# Altium PCB PCB1.PcbDoc
Units mil, origin at the board's own origin, x right, y up, seen from the top; angles counter-clockwise.
Board outline 870 x 2045 mil, 2 copper layers (Top Layer, Bottom Layer); 38 components, 55 nets, 170 pads, 24 vias.
Unrouted connection lines stored in the file: 35.
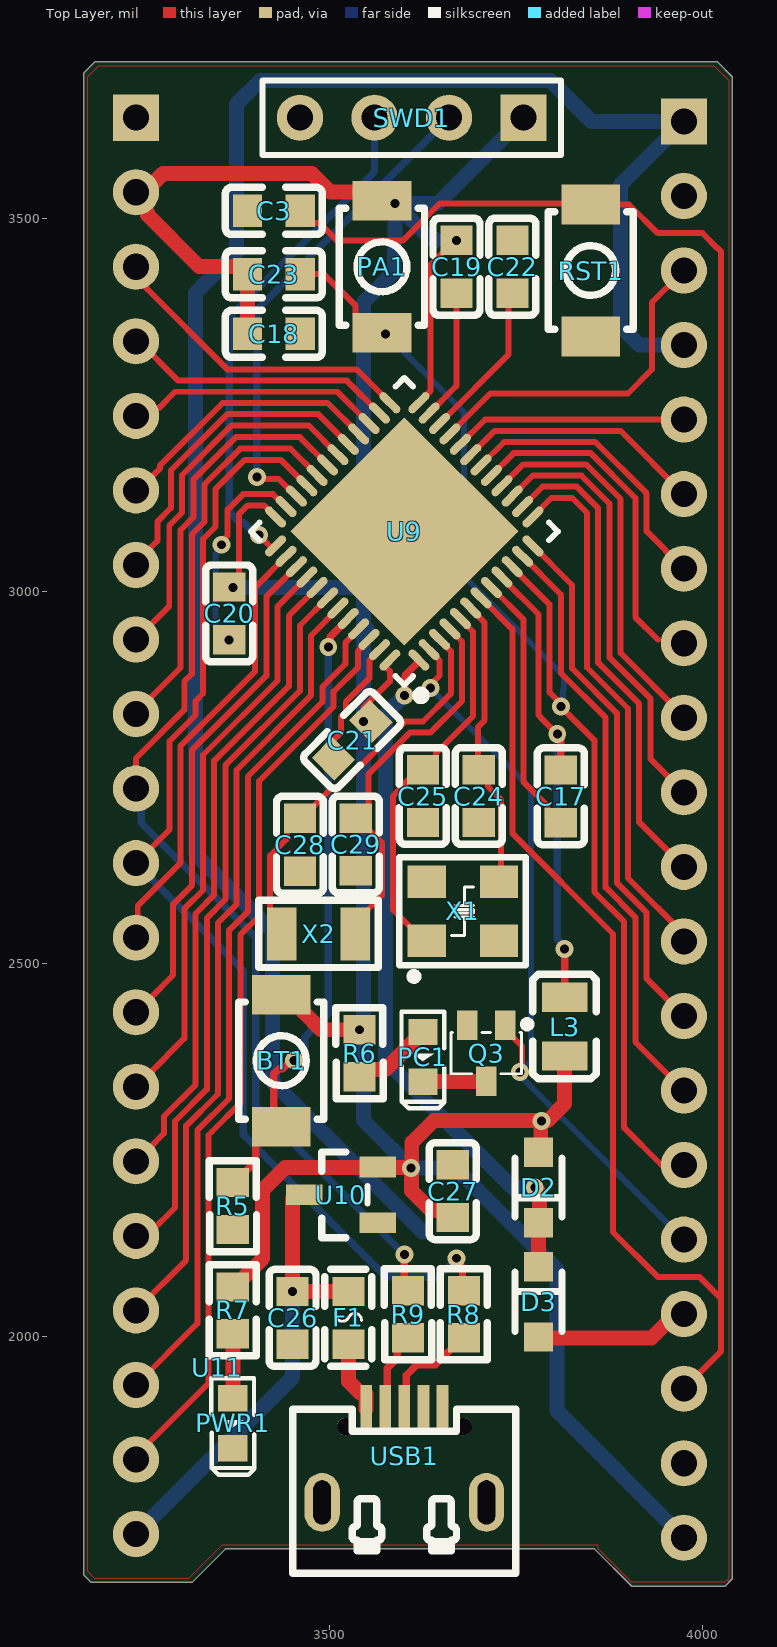
[diagram p0: Top Layer view]
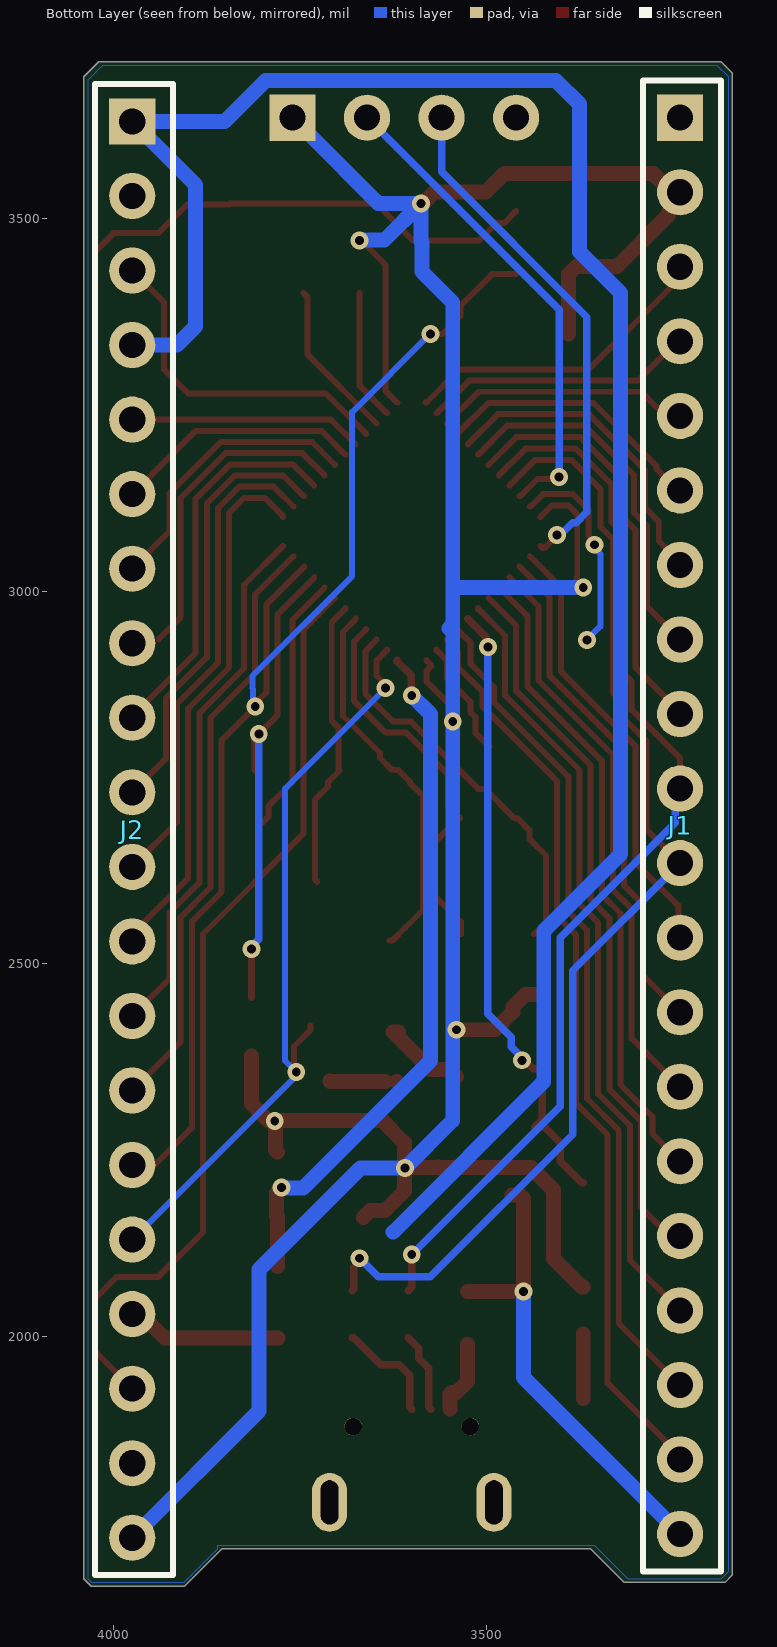
[diagram p1: Bottom Layer view, seen from below]

## Layer stack, top to bottom
Top Solder: solder mask 0.4, Solder Resist, Dk 3.5
Top Layer: signal copper 1.4
Dielectric 1: dielectric 12.6, FR-4, Dk 4.8
Bottom Layer: signal copper 1.4
Bottom Solder: solder mask 0.4, Solder Resist, Dk 3.5

## Board outline
3170,1680 3180,1670 3315,1670 3360,1715 3855,1715 3905,1665 4030,1665 4040,1675 4040,3690 4020,3710 3185,3710 3170,3695

## Design rules (kind name [scope] priority, off if disabled: settings)
Clearance [All] p1: gap=7 ignorepadtopadclearanceinfootprint=TRUE
PolygonConnect [All] p1: connectstyle=Relief reliefconductorwidth=10 reliefentries=4 polygonreliefangle="90 Angle" airgapwidth=10
RoutingVias [All] p1: holewidth=28 width=50 viastyle="Through Hole" minholewidth=28 minwidth=50 maxholewidth=28 maxwidth=50
SolderMaskExpansion [All] p1: expansion=4 istentingtop=FALSE
Width [All] p1: maxlimit=20 minlimit=7 preferedwidth=10
30 further rules are at their usual default settings.

## Components (designator, comment, footprint, x,y, rotation, side; value= is the part's Value field where it differs from the comment)
BT1 "TS-1088R-02026" SW-SMD_L3.9-W3.0-P4.45 3435,2370 r90 top
C3 "0.1u" C0603 3425,3510 r0 top
C17 "0.1u" C0603 3810,2724.57 r270 top
C18 "10u" C0603 3425,3345 r180 top
C19 "0.1u" C0603 3670,3435 r90 top
C20 "0.1u" C0603 3365,2970 r90 top
C21 "0.1u" C0603 3530,2800 r45 top
C22 "4.7u" C0603 3745,3435 r90 top
C23 "0.1u" C0603 3425,3425 r0 top
C24 "10p" C0603 3700,2725 r90 top
C25 "10p" C0603 3625,2725 r270 top
C26 "10u" C0603 3450,2025 r90 top
C27 "1u" C0603 3665,2195 r270 top
C28 "5p" C0603 3460,2659.57 r90 top
C29 "5p" C0603 3535,2660 r90 top
D2 "BAT54WS_C397611" SOD-323_L1.8-W1.3-LS2.5-RD 3780,2200 r90 top
D3 "BAT54WS_C397611" SOD-323_L1.8-W1.3-LS2.5-RD 3780,2046.54 r270 top
F1 "0.5A/6V" F0603 3525,2025 r90 top
J1 "HDR-M-2.54_1x20" HDR-M-2.54_1X20 3240,2685 r90 bottom locked
J2 "HDR-M-2.54_1x20" HDR-M-2.54_1X20 3975,2680 r90 bottom
L3 "10uH" L0805 3815,2415.63 r90 top
PA1 "TS-1088R-02026" SW-SMD_L3.9-W3.0-P4.45 3570,3435 r90 top
PC1 "LED-0603_R" LED0603_GREEN 3625,2375 r270 top
PWR1 "LED-0603_G" LED0603_GREEN 3370,1883.46 r270 top
Q3 "L2N7002WT1G" SC-70-3_L2.1-W1.3-P1.30-LS2.1-BR 3710,2380 r90 top
R5 "1k" R0603 3370,2175 r90 top
R6 "1k" R0603 3540,2380 r270 top
R7 "1k" R0603 3370,2035 r270 top
R8 "22" R0603 3680,2030 r270 top
R9 "22" R0603 3605,2030 r270 top
RST1 "TS-1088R-02026" SW-SMD_L3.9-W3.0-P4.45 3850,3430 r270 top
SWD1 "HDR-M-2.54_1x4" HDR-M-2.54_1X4 3610,3635 r180 top
U9 "STM32F401CCU6" UFQFPN-48_L7.0-W7.0-P0.50-BL-EP 3600,3080 r45 top locked
U10 "XC6206P332MR" SOT-23(SOT-23-3) 3515,2190 r90 top
U11 "CH340E" MSOP-10_L3.0-W3.0-P0.50-LS5.0-BL 3348.95,1958.05 r90 top
USB1 "U-F-M5DW-Y-4" MICRO-USB-A12 3600,1840 r0 top
X1 "25MHz" XTAL-3225 3633,2533 r90 top locked
X2 "32.768KHz" OSC-SMD_L3.2-W1.5 3485,2540 r180 top

## Footprints (in the part's own frame and the unit in brackets; to place one, negate y for a bottom-side part, rotate by r counter-clockwise, add the part's x,y. Pads: shape width x height; smd on the part's side, far side on the other; paste and mask are expansions set on the pad)
C0603 [mm]
  rect 1x1.1 smd: 1(-0.9,0) 2(0.9,0)
  silkscreen extent -1.65,-0.8 1.65,0.8
F0603 [mm]
  rect 1x1.1 smd: 1(-0.9,0) 2(0.9,0)
  silkscreen extent -1.65,-0.8 1.65,0.8
HDR-M-2.54_1X4 [mil]
  rect 62x62 hole 35: 1(-150,0)
  round 62 hole 35: 2(-50,0) 3(50,0) 4(150,0)
  silkscreen extent -200,-50 200,50
HDR-M-2.54_1X20 [mil]
  rect 62x62 hole 35: 1(950,0)
  round 62 hole 35: 2(850,0) 3(750,0) 4(650,0) 5(550,0) 6(450,0) 7(350,0) 8(250,0) 9(150,0) 10(50,0) 11(-50,0) 12(-150,0) 13(-250,0) 14(-350,0) 15(-450,0) 16(-550,0) 17(-650,0) 18(-750,0) 19(-850,0) 20(-950,0)
  silkscreen extent -1000,-55 1000,50
L0805 [mm]
  rect 1x1.55 smd: 1(-1,0) 2(1,0)
  silkscreen extent -1.78,-1.08 1.78,1.08
LED0603_GREEN [mm]
  rect 0.9x1 smd: 1(-0.85,0) 2(0.85,0)
  silkscreen extent -1.54,-0.73 1.75,0.73
MICRO-USB-A12 [mm]
  rect 0.4x1.65 smd: 1(-1.3,1.59) 2(-0.65,1.59) 3(0,1.59) 4(0.65,1.59) 5(1.3,1.59)
  oval 1.2x2 hole 0.6 slot 1.5 at 90 deg: 6(2.799,-1.59) 7(-2.799,-1.59)
  round 0.6 hole 0.6 unplated: ""(-1.999,0.991) ""(1.999,0.991)
  silkscreen extent -3.8,-4.01 3.8,1.59
MSOP-10_L3.0-W3.0-P0.50-LS5.0-BL [mil]
OSC-SMD_L3.2-W1.5 [mm]
  rect 1x1.8 smd: 1(-1.25,0) 2(1.25,0)
  silkscreen extent -2.03,-1.14 2.03,1.14
R0603 [mm]
  rect 1x1.1 smd: 1(0.8,0) 2(-0.8,0)
  silkscreen extent -1.55,-0.81 1.55,0.8
SC-70-3_L2.1-W1.3-P1.30-LS2.1-BR [mm]
  rect 1x0.7 smd: 1(0.95,-0.65) 2(0.95,0.65) 3(-0.95,0)
  silkscreen extent -0.7,-1.63 1.23,1.2
SOD-323_L1.8-W1.3-LS2.5-RD [mm]
  rect 1x1 smd: 1(-1.2,0) 2(1.2,0)
  silkscreen extent -1,-0.8 1,0.8
SOT-23(SOT-23-3) [mm]
  rect 0.7x1.25 smd: 1(-0.95,-1.25) 2(0.95,-1.25) 3(0,1.25)
  silkscreen extent -1.46,-0.9 1.46,0.65
SW-SMD_L3.9-W3.0-P4.45 [mm]
  rect 1.35x2 smd: 1(-2.25,0) 2(2.25,0)
  silkscreen extent -2,-1.45 2,1.45
UFQFPN-48_L7.0-W7.0-P0.50-BL-EP [mm]
  oval 0.28x0.9 smd: 1(-2.751,-3.449) 2(-2.25,-3.449) 3(-1.75,-3.449) 4(-1.25,-3.449) 5(-0.749,-3.449) 6(-0.249,-3.449) 7(0.249,-3.449) 8(0.749,-3.449) 9(1.25,-3.449) 10(1.75,-3.449) 11(2.25,-3.449) 12(2.751,-3.449) 25(2.751,3.449) 26(2.25,3.449) 27(1.75,3.449) 28(1.25,3.449) 29(0.749,3.449) 30(0.249,3.449) 31(-0.249,3.449) 32(-0.749,3.449) 33(-1.25,3.449) 34(-1.75,3.449) 35(-2.25,3.449) 36(-2.751,3.449)
  oval 0.9x0.28 smd: 13(3.449,-2.751) 14(3.449,-2.25) 15(3.449,-1.75) 16(3.449,-1.25) 17(3.449,-0.749) 18(3.449,-0.249) 19(3.449,0.249) 20(3.449,0.749) 21(3.449,1.25) 22(3.449,1.75) 23(3.449,2.25) 24(3.449,2.751) 37(-3.449,2.751) 38(-3.449,2.25) 39(-3.449,1.75) 40(-3.449,1.25) 41(-3.449,0.749) 42(-3.449,0.249) 43(-3.449,-0.249) 44(-3.449,-0.749) 45(-3.449,-1.25) 46(-3.449,-1.75) 47(-3.449,-2.25) 48(-3.449,-2.751)
  rect 5.5x5.5 smd: 49(0,0)
  silkscreen extent -3.7,-4.5 3.7,3.7
XTAL-3225 [mil]
  rect 43.31x51.18 smd: 1(-2,3) 2(-2,-94) 3(77,-94) 4(77,3)
  silkscreen extent -55,-130 110,40, body extent -13,-108 85,18, height 31

## Part data
BT1 PA1 RST1: BOM_Manufacturer=XUNPU, BOM_Manufacturer Part=TS-1088R-02026, BOM_Supplier=LCSC, BOM_Supplier Part=C455280, Contributor=LCSC, spicePre=S, spiceSymbolName=TS-1088R-02026
D2 D3: BOM_Manufacturer=AnBon, BOM_Manufacturer Part=BAT54WS, BOM_Supplier=LCSC, BOM_Supplier Part=C397611, Contributor=LCSC, spicePre=D, spiceSymbolName=BAT54WS_C397611
F1: BOM_Manufacturer=BOURNS, BOM_Manufacturer Part=MF-FSMF050X-2, BOM_Supplier=LCSC, BOM_Supplier Part=C210357, Contributor=LCSC, spicePre=F, spiceSymbolName=MF-FSMF050X-2
L3: BOM_Manufacturer=microgate, BOM_Manufacturer Part=MGFI2012D100KT-LF, BOM_Supplier=LCSC, BOM_Supplier Part=C281097, Contributor=LCSC, nameAlias=Inductance, spicePre=L, spiceSymbolName=MGFI2012D100KT-LF
PC1: BOM_Manufacturer=EVERLIGHT(台湾亿光), BOM_Manufacturer Part=19-217/R6C-AL1M2VY/3T, BOM_Supplier=LCSC, BOM_Supplier Part=C72044, Contributor=LCEDA_01, spicePre=L, spiceSymbolName=LED-0603_R
PWR1: BOM_Manufacturer=EVERLIGHT(台湾亿光), BOM_Manufacturer Part=19-217/GHC-YR1S2/3T, BOM_Supplier=LCSC, BOM_Supplier Part=C72043, Contributor=LCEDA_Lib, spicePre=L, spiceSymbolName=LED-0603_G
Q3: BOM_LCSC Assembly=Yes, BOM_Manufacturer=LRC, BOM_Manufacturer Part=L2N7002WT1G, BOM_Supplier=LCSC, BOM_Supplier Part=C12778, SMT Type=Extend, spicePre=Q, spiceSymbolName=L2N7002WT1G
U9: BOM_Manufacturer=ST, BOM_Manufacturer Part=STM32F401CCU6, BOM_Supplier=LCSC, BOM_Supplier Part=C79861, spicePre=U, spiceSymbolName=STM32F401CCU6, subpart_no=1, tags=STM32
U10: BOM_LCSC Assembly=Yes, BOM_Manufacturer=TOREX, BOM_Manufacturer Part=XC6206P332MR, BOM_Supplier=LCSC, BOM_Supplier Part=C5446, image=//image.lceda.cn/szlcsc/C5446.jpg, SMT Type=Basic, spicePre=U
U11: BOM_LCSC Assembly=Yes, BOM_Manufacturer=WCH, BOM_Manufacturer Part=CH340E, BOM_Supplier=LCSC, BOM_Supplier Part=C99652, SMT Type=Extend, spicePre=U, spiceSymbolName=CH340E
USB1: BOM_Manufacturer=HRO, BOM_Manufacturer Part=U-F-M5DW-Y-4, BOM_Supplier=LCSC, BOM_Supplier Part=C145784, Contributor=LCSC, spicePre=U
X1: BOM_LCSC Assembly=Yes, BOM_Manufacturer="Zhejiang Abel Elec", BOM_Manufacturer Part=TAXM8M4RDBCCT2T, BOM_Supplier=LCSC, BOM_Supplier Part=C400090, Contributor=LCSC, nameAlias=Frequency, SMT Type=Extend, spicePre=X, spiceSymbolName=TAXM8M4RDBCCT2T
X2: BOM_Manufacturer=EPSON, BOM_Manufacturer Part=Q13FC1350004900, BOM_Supplier=LCSC, BOM_Supplier Part=C95361, nameAlias=Frequency, spicePre=X, spiceSymbolName=Q13FC1350004900
C3 C17 C19 C20 C21 C22 C23 C24 C25 C28 C29: Contributor=LCEDA_Lib, nameAlias=Value(F), spicePre=C, spiceSymbolName=C_0402_US
C18: Contributor=LCEDA_Lib, nameAlias=Value(F), spicePre=C, spiceSymbolName=C_0805_US
C26: nameAlias=Value(F), spicePre=C, spiceSymbolName=Cap_0805_US
C27: nameAlias=Value(F), spicePre=C, spiceSymbolName=Cap_RAD-0.1_US
J1 J2: BOM_Supplier=LCSC, BOM_Supplier Part=C50981, Contributor=LCEDA_Lib, spicePre=J, spiceSymbolName=HDR-M-2.54_1x20
R5 R6 R7: Contributor=LCEDA_Lib, nameAlias=Value(Ω), spicePre=R, spiceSymbolName=R_0402_US
R8 R9: Contributor=LCEDA_Lib, nameAlias=Value(Ω), spicePre=R, spiceSymbolName=R_0603_US
SWD1: BOM_Supplier=LCSC, BOM_Supplier Part=C124378, Contributor=LCEDA_Lib, spicePre=J, spiceSymbolName=HDR-M-2.54_1x4

## Via types
v1: diameter 24, hole 12, Top Layer to Bottom Layer, 24 vias

## Nets (pads, with @x,y where several pads share a name; then routed paths per layer and width w, separated by ;. In a path a pad name is that pad's centre, name@x,y a point inside that pad or via, vN(x,y) a via of type N, cw(c..) or ccw(c..) an arc to the next point about the centre after c; other vN are vias at no path point)
+5V: C26.2 F1.2 J1.20 J2.1 J2.4 U10.3 | length 3333.8
  Top Layer w20: U10.3 3454.97,2190 3450,2185.03 v1(3450,2060.43) F1.2
  Bottom Layer w20: J1.20 3450,1945 v1(3450,2060.43) ; 3625,2140 3423,2342 3423,2543.92 3320,2646.92 3320,3400 3375,3455 3375,3653.28 3406.72,3685 3796.04,3685 3851.04,3630 J2.1 3890,3545 3890,3355 3915,3330 J2.4
BAT: D3.2 J2.17 | length 209.1
  Top Layer w20: D3.2@3779.26,1997.76 3931.39,1997.76 3963.63,2030 J2.17
BOOT0: BT1.1 R5.1 U9.44 | length 842.8
  Top Layer w10: R5.1 3371.97,2206.49 3400.63,2235.15 3400.63,2259.84 3422.2,2281.41 BT1.1 3425,2291.41 3425,2352.25 3432.07,2359.32 3437.03,2359.32 3448.21,2370.51 v1(3452,2370.51) ; v1(3498,2925) 3500.68,2927.68 3500.68,2938.96 U9.44
  Bottom Layer w10: v1(3452,2370.51) 3452,2374.29 3466.38,2388.67 3466.38,2401.38 3498,2433 v1(3498,2925)
GND: C3.1 C17.2 C18.1 C19.1 C20.1 C21.1 C22.2 C24.1 C25.2 C26.1 C27.1 C28.1 C29.1 J1.1 J2.2 J2.19 PWR1.2 Q3.2 R5.2 RST1.2 SWD1.4 U9.8 U9.23 U9.35 U9.47 U10.1 USB1.5 USB1.6 USB1.7 X1.2 X1.4 | length 965.9
  Top Layer w8: v1(3355,3062.12) 3355,3066.45 3363,3074.45 3363,3109.21 3383.79,3130 3423.88,3130 3440.51,3113.38 U9.35 ; C21.1@3495.93,2790.93 3514.82,2809.82 3514.82,2831 3521.45,2837.62 3521.45,2851.45 3553,2883 3553,2906.88 3566.62,2920.51 U9.47 ; U9.23 3670,3275.3 C19.1 ; U9.8 3760,2961.72 3760,2743.54 3792.35,2711.19 3792.35,2697.22 C17.2@3800,2689.57
  Bottom Layer w8: v1(3355,3062.12) 3355,3057.79 3347,3049.79 3347,2952.57 3360.43,2939.13 v1@3364.76,2939.13
  other v1: 3365,2934.57
NetF1_1: F1.1 USB1.1 | length 100.9
  Top Layer w20: F1.1 3525,1939.88 3539.8,1925.08 3546.67,1925.08 3548.8,1922.95 USB1.1
NetJP1_1: R8.1 USB1.3 | length 144.6
  Top Layer w10: USB1.3 3602.87,1905.47 3602.87,1947.87 3616.94,1961.94 3641.46,1961.94 3678.03,1998.51 R8.1
NetJP1_2: 
NetJP2_1: R9.1 USB1.2 | length 108.6
  Top Layer w10: USB1.2 3577.27,1905.47 3577.27,1957.27 3590.48,1970.48 3590.48,1983.98 R9.1
NetJP2_2: 
NetJP3_1: 
NetJP4_1: 
NetPC1_1: PC1.1 R6.1 | length 111.8
  Top Layer w20: R6.1 3549.68,2358.19 3574.72,2358.19 PC1.1 ; PC1.1@3618.03,2408.47 PC1.1@3620,2408.47
NetPC1_2: PC1.2 Q3.3 | length 75.4
  Top Layer w20: PC1.2@3620,2341.54 PC1.2@3620.53,2342.07 ; PC1.2@3635.53,2342.07 3709.47,2342.07 Q3.3
NetPWR1_1: PWR1.1 R7.1 | length 86.6
  Top Layer w20: PWR1.1 R7.1
NRST: C3.2 J2.18 RST1.1 U9.7 | length 3276.3
  Top Layer w8: C3.2 3460.43,3509.31 3476.12,3493.63 3486.37,3493.63 3510,3470 3597.92,3470 3647.92,3520 3843.59,3520 RST1.1@3845,3518.59 ; U9.7 3745,2948.86 3745,2675 3880,2540 3880,2140 3940,2080 3995.71,2080 4025,2050.71 ; RST1.1 3901.41,3518.59 3940,3480 4000,3480 4020,3460 4020.31,3460 4025,3455.31 4025,2050.71 ; J2.18 4025,1980 4025,2050.71
OSC32-IN: C28.2 U9.3 X2.2 | length 527.5
  Top Layer w8: X2.2 3420.1,2555.68 3420.1,2576.02 3420,2576.12 3420,2645.31 3442.35,2667.66 3442.35,2679.32 3458.03,2695 C28.2 ; C28.2@3462.4,2695.43 3501.68,2734.72 3510.89,2734.72 3601.18,2825 3625,2825 3662.35,2862.35 3662.35,2919.4 3647.3,2934.44 U9.3
OSC32-OUT: C29.2 U9.4 X2.1 | length 520.7
  Top Layer w8: X2.1 3534.21,2555.75 3570,2591.54 3570,2662.4 C29.2@3536.97,2695.43 ; C29.2 C29.2@3536.97,2695.43 ; U9.4 3661.24,2948.37 3677.35,2932.26 3677.35,2852.35 3635,2810 3607.39,2810 3551.65,2754.26 3551.65,2710.12 C29.2@3536.97,2695.43
OSC-IN: C25.1 U9.5 X1.1 | length 506.4
  Top Layer w8: C25.1@3621.97,2760 3618.03,2760 3602.35,2744.32 3602.35,2742.35 3590,2730 3585,2725 3585,2572.06 3608.41,2548.65 3626.06,2531 X1.1 ; C25.1 3626.97,2760.43 3642.65,2776.12 3642.65,2782.65 3692.35,2832.35 3692.35,2945.12 3675.16,2962.3 U9.5
OSC-OUT: C24.2 U9.6 X1.3 | length 394.1
  Top Layer w8: U9.6 3689.09,2976.23 3707.35,2957.98 3707.35,2826.13 3698.6,2817.39 3698.6,2761.31 3696.65,2759.36 3712.34,2743.67 3712.34,2737.66 3730,2720 3730,2613 X1.3
PA0: C23.2 J2.15 PA1.1 U9.10 | length 1671.9
  Top Layer w8: C23.2 3492.12,3425 3534.63,3382.49 3534.63,3368.99 3558.62,3345 v1(3575,3345) ; U9.10 3744.74,3031.88 3795,2981.62 3795,2863.94 3810,2848.94 v1(3810,2845) 3855,2800 3855,2596.21 3895,2556.21 3895,2280 3945,2230 J2.15
  Bottom Layer w8: v1(3575,3345) 3680,3240 3680,3020 3813.94,2886.06 3813.94,2869.66 3813.06,2868.79 3813.06,2848.06 v1(3810,2845)
PA1: J2.14 U9.11 | length 806.2
  Top Layer w8: U9.11 3810,2995.3 3810,2890 3870,2830 3870,2602.43 3910,2562.43 3910,2395 J2.14
PA2: J2.13 U9.12 | length 714.4
  Top Layer w8: U9.12 3825,3008.16 3825,2896.21 3885,2836.21 3885,2608.64 3925,2568.64 3925,2480 J2.13
PA3: J2.12 U9.13 | length 714
  Top Layer w8: U9.13 3772.61,3100.17 3797.43,3125 3825,3125 3845,3105 3845,2897.43 3900,2842.43 3900,2614.85 J2.12@3977.35,2537.5
PA4: J2.11 U9.14 | length 653.1
  Top Layer w8: U9.14 3785.3,3140 3831.21,3140 3860,3111.21 3860,2903.64 3915,2848.64 3915,2690 J2.11
PA5: J2.10 U9.15 | length 586.1
  Top Layer w8: U9.15 3772.44,3155 3837.43,3155 3875,3117.43 3875,2910.96 3930,2855.96 3930,2775 J2.10
PA6: J2.9 U9.16 | length 519.2
  Top Layer w8: U9.16 3759.58,3170 3843.64,3170 3890,3123.64 3890,2917.17 3975,2832.17 J2.9
PA7: J2.8 U9.17 | length 432.7
  Top Layer w8: U9.17 3746.72,3185 3849.85,3185 3910,3124.85 3910,2965 3940,2935
PA8: J1.7 U9.29 | length 419.1
  Top Layer w8: J1.7@3251.8,3043.2 3251.8,3050.27 3268.67,3067.14 3268.67,3093.16 3287,3111.5 3287,3161.85 3362.49,3237.35 3484.37,3237.35 U9.29
PA9: J1.8 U9.30 | length 499.2
  Top Layer w8: J1.8 3284.67,2979.67 3284.67,3087.95 3302,3105.28 3302,3155.64 3368.71,3222.35 3471.51,3222.35 U9.30
PA10: J1.9 U9.31 | length 565.4
  Top Layer w8: J1.9 3240,2837.5 3299.67,2897.17 3299.67,3081.74 3317,3099.07 3317,3149.43 3373.92,3206.35 3459.79,3206.35 U9.31
PA11: J1.10 R9.2 U9.32 | length 1456.8
  Top Layer w8: J1.10 3240,2775.6 3305,2840.6 3305,2878.79 3315,2888.79 3315,3075.86 3332,3092.86 3332,3143.21 3379.79,3191 3447.28,3191 U9.32
  Top Layer w10: v1(3600,2110) 3600,2066.49 R9.2
  Bottom Layer w10: J1.10 3246.81,2728.19 3246.81,2689 3401,2534.81 3401,2309 v1(3600,2110)
PA12: J1.11 R8.2 U9.33 | length 1545.8
  Top Layer w8: J1.11 3285,2680 3285,2798.64 3320,2833.64 3320,2852.57 3330,2862.57 3330,3069.64 3347,3086.64 3347,3137 3386,3176 3434.42,3176 U9.33
  Top Layer w10: v1(3670,2105) 3670,2101.21 3678.03,2093.18 3678.03,2063.46 R8.2
  Bottom Layer w10: J1.11 3384,2491 3384,2271 3575,2080 3645,2080 v1(3670,2105)
PA15: J1.12 U9.38 | length 594
  Top Layer w8: J1.12@3242.4,2535 3242.4,2578 3300,2635.6 3300,2792.43 3400,2892.43 3400,3005.3 U9.38
PB0: J2.7 U9.18 | length 385.2
  Top Layer w8: U9.18 3733.86,3200 3856.07,3200 3925,3131.07 3925,3080 J2.7
PB1: J2.6 U9.19 | length 334.4
  Top Layer w8: U9.19 3721.14,3215 3890,3215 J2.6
PB2: J2.5 U9.20 | length 332.7
  Top Layer w8: U9.20 3708.28,3230 3980,3230 J2.5@3990,3220
PB3: J1.13 U9.39 | length 677.2
  Top Layer w8: J1.13@3257.64,2437.36 3257.64,2452.64 3290,2485 3290,2579.85 3315,2604.85 3315,2786.21 3415,2886.21 3415,2992.44 U9.39
PB4: J1.14 U9.40 | length 769
  Top Layer w8: J1.14@3257.64,2337.36 3257.64,2352.64 3305,2400 3305,2573.64 3330,2598.64 3330,2780 3430,2880 3430,2979.58 U9.40
PB5: J1.15 U9.41 | length 860.9
  Top Layer w8: J1.15@3257.64,2237.36 3257.64,2252.64 3277.35,2272.35 3277.35,2295.17 3320,2337.82 3320,2567.43 3345,2592.43 3345,2772.43 3445,2872.43 3445,2966.72 U9.41
PB6: J1.16 U9.42 | length 948.7
  Top Layer w8: J1.16@3260,2140.39 3292.35,2172.73 3292.35,2288.95 3335,2331.61 3335,2561.21 3360,2586.21 3360,2766.21 3460,2866.21 3460,2953.86 U9.42
PB7: J1.17 U9.43 | length 1057.6
  Top Layer w8: J1.17 3307.35,2102.35 3307.35,2282.74 3350,2325.39 3350,2555 3375,2580 3375,2760 3475,2860 3475,2940.32 3510.9,2976.23 U9.43 ; J1.17@3260,2035 J1.17@3262.4,2037.4
PB8: J1.18 U9.45 | length 1137.9
  Top Layer w8: J1.18 3322.35,2017.35 3322.35,2276.53 3365,2319.18 3365,2545 3390,2570 3390,2751.21 3490,2851.21 3490,2871.21 3521,2902.21 3521,2930.6 3538.76,2948.37 U9.45
PB9: J1.19 U9.46 | length 1229.8
  Top Layer w8: J1.19 3240,1839.89 3337.35,1937.23 3337.35,2270.31 3342.03,2275 3380,2312.97 3380,2538.79 3405,2563.79 3405,2745 3505,2845 3505,2865 3538,2898 3538,2919.74 3552.69,2934.44 U9.46
PB10: J2.3 U9.21 | length 457.3
  Top Layer w8: U9.21 3715.42,3265 3900,3265 3932.33,3297.33 3932.33,3387.33 J2.3
PB12: J1.3 U9.25 | length 426.4
  Top Layer w8: J1.3 3240,3420.39 3254.91,3405.48 3254.91,3405.09 3362.65,3297.35 3535.81,3297.35 3580.21,3252.95 3581.3,3252.95 3580.96,3252.61 U9.25
PB13: J1.4 U9.26 | length 366.5
  Top Layer w8: J1.4 3244,3335 3296.65,3282.35 3522.95,3282.35 U9.26
PB14: J1.5 U9.27 | length 343.7
  Top Layer w8: J1.5 3250.33,3245.33 3270.33,3245.33 3292.35,3267.35 3510.09,3267.35 U9.27
PB15: J1.6 U9.28 | length 366.8
  Top Layer w8: J1.6 3242.73,3135 3272,3164.27 3272,3168.07 3356.28,3252.35 3497.23,3252.35 U9.28
PC13: J2.16 Q3.1 U9.2 | length 1027
  Top Layer w8: U9.2 3633.38,2920.51 3647.35,2906.54 3647.35,2886.68 3635,2874.33 v1(3635,2870) ; Q3.1 3735.59,2411.5 3758.06,2389.02 3758.06,2358.06 v1(3755,2355)
  Bottom Layer w8: v1(3635,2870) 3770,2735 3770,2370 v1(3755,2355) ; v1@3752.5,2352.5 3780,2325 J2.16
SWCLK: SWD1.3 U9.37 | length 693.5
  Top Layer w8: v1(3405,3075) 3422.43,3057.57 3424.41,3057.57 U9.37
  Bottom Layer w10: v1(3405,3075) 3401.21,3075 3384.37,3091.84 3379.16,3091.84 3365,3106 3365,3367.58 3560,3562.58 SWD1.3
SWDIO: SWD1.2 U9.34 | length 652.3
  Top Layer w8: v1(3402.33,3153) 3404.98,3150.35 3431.4,3150.35 3454.44,3127.3 U9.34
  Bottom Layer w10: v1(3402.33,3153) 3402.33,3377.33 SWD1.2
VBAT: D2.1 D3.1 U9.1 | length 937.3
  Top Layer w10: v1(3600,2860) 3600.92,2860.92 3600.92,2887 3620.04,2906.13 3619.44,2906.73 U9.1
  Top Layer w20: v1(3775,2200) 3775,2198.92 3781.45,2192.47 3781.45,2162.44 3780,2160.99 D3.1
  Bottom Layer w20: v1(3600,2860) 3575,2835 3575,2370 3745.77,2199.23 v1@3775.77,2199.23
VCAP1: C22.1 U9.22 | length 215.3
  Top Layer w8: U9.22 3740,3317.44 3740,3394.57 C22.1
VCC: BT1.2 C18.2 C19.2 C20.2 C21.2 C23.1 C27.2 D2.2 J1.2 J2.20 L3.1 PA1.2 R6.2 R7.2 SWD1.1 U9.24 U9.36 U9.48 U10.2 | length 4622.6
  Top Layer w8: C20.2@3378.89,3016.54 3378,3017.43 3378,3103 3390,3115 3411.84,3115 U9.36 ; C21.2@3545.06,2835.06 3545.06,2843.35 3580.55,2878.85 3580.55,2892.57 3574.13,2898.99 3574.13,2900.97 U9.48 ; U9.24 3635,3268.16 3635,3437.4 3668.03,3470.43 C19.2
  Top Layer w20: R7.2 3371.97,2066.49 3409.94,2104.46 3409.94,2196.57 3440.15,2226.77 U10.2@3564.83,2226.77 ; C18.2 C23.1 3389.57,3425.43 3379.88,3435.12 3324.88,3435.12 3255.63,3504.37 3255.63,3508 3240,3523.63 J1.2 3251.37,3535 3276.37,3560 3475.81,3560 3500.63,3535.18 3569.82,3535.18 3585,3520 3587.67,3520 v1(3587.75,3519.92) ; BT1.2 3447.8,2458.59 3464.37,2442.01 3464.37,2435.47 3488.35,2411.49 v1(3540,2411.49) ; U10.2 U10.2@3564.83,2226.77 ; C27.2 3655.32,2169.25 3635.75,2169.25 3609.62,2195.38 3609.62,2225.38 v1(3608.85,2226.15) ; D2.2 3783.06,2250.31 3783.06,2288.06 v1(3783.83,2288.83) 3783.06,2289.59 3780.23,2289.59 3779.82,2290 3640,2290 3610,2260 3610,2230.12 3609.62,2229.74 3609.62,2226.91 v1(3608.85,2226.15) ; v1@3783.83,2289.59 3792.35,2289.59 3815,2312.24 L3.1 ; U10.2@3564.83,2226.77 3608.23,2226.77 v1(3608.85,2226.15)
  Bottom Layer w20: v1(3370,3005) 3545,3005 ; 3550,2950 3545,2955 ; v1@3588.58,3519.92 3644.92,3519.92 3739,3614 SWD1.1 ; v1(3670,3470) 3669.23,3470.77 3636.91,3470.77 v1(3587.75,3519.92) 3587.75,3469.17 3586.5,3467.92 3586.5,3428.62 3545,3387.12 3545,3005 ; J2.20 3805,1900 3805,2090 3668.85,2226.15 v1(3608.85,2226.15) 3545,2290 3545,2411.49 v1(3545,2825) 3545,2955 ; 3545,2955 3545,3005
VDDA: C17.1 L3.2 U9.9 | length 649.2
  Top Layer w8: U9.9 3730.82,3017.95 3780,2968.76 3780,2833.85 3782.5,2831.35 3782.5,2830.77 v1(3805.21,2808.06)
  Top Layer w10: v1@3805.21,2806.98 3810,2802.19 C17.1 ; L3.2 v1(3815,2520)
  Top Layer w20: v1@3805.21,2806.98 v1(3805.21,2808.06)
  Bottom Layer w10: v1@3805.21,2807.52 3805.21,2532.86 3815,2523.07 v1(3815,2520)
  Bottom Layer w20: v1@3805.21,2806.98 v1(3805.21,2808.06)
pads on no net: U9.49 USB1. USB1.4

## Polygon pours and split planes (outlines as drawn)
no net on Top Layer "NONET_L01_P001" (solid, shelved, pour order 1): 4015,3705 4035,3685 4035,1675 4030,1670 3905,1670 3860,1715 3860,1720 3355,1720 3310,1675 3185,1675 3175,1685 3175,3690 3190,3705
GND on Bottom Layer "NONET_L02_P000" (solid, shelved, pour order 0): 4015,3705 4035,3685 4035,1675 4030,1670 3905,1670 3860,1715 3860,1720 3355,1720 3310,1675 3185,1675 3175,1685 3175,3690 3190,3705

## Silkscreen, mask and mechanical layers (free items; w line width, h text height)
Mechanical 1:
  the board outline again, w10